# EAGLE board dancing-light-pcb-v1 (EAGLE 8.6.1)
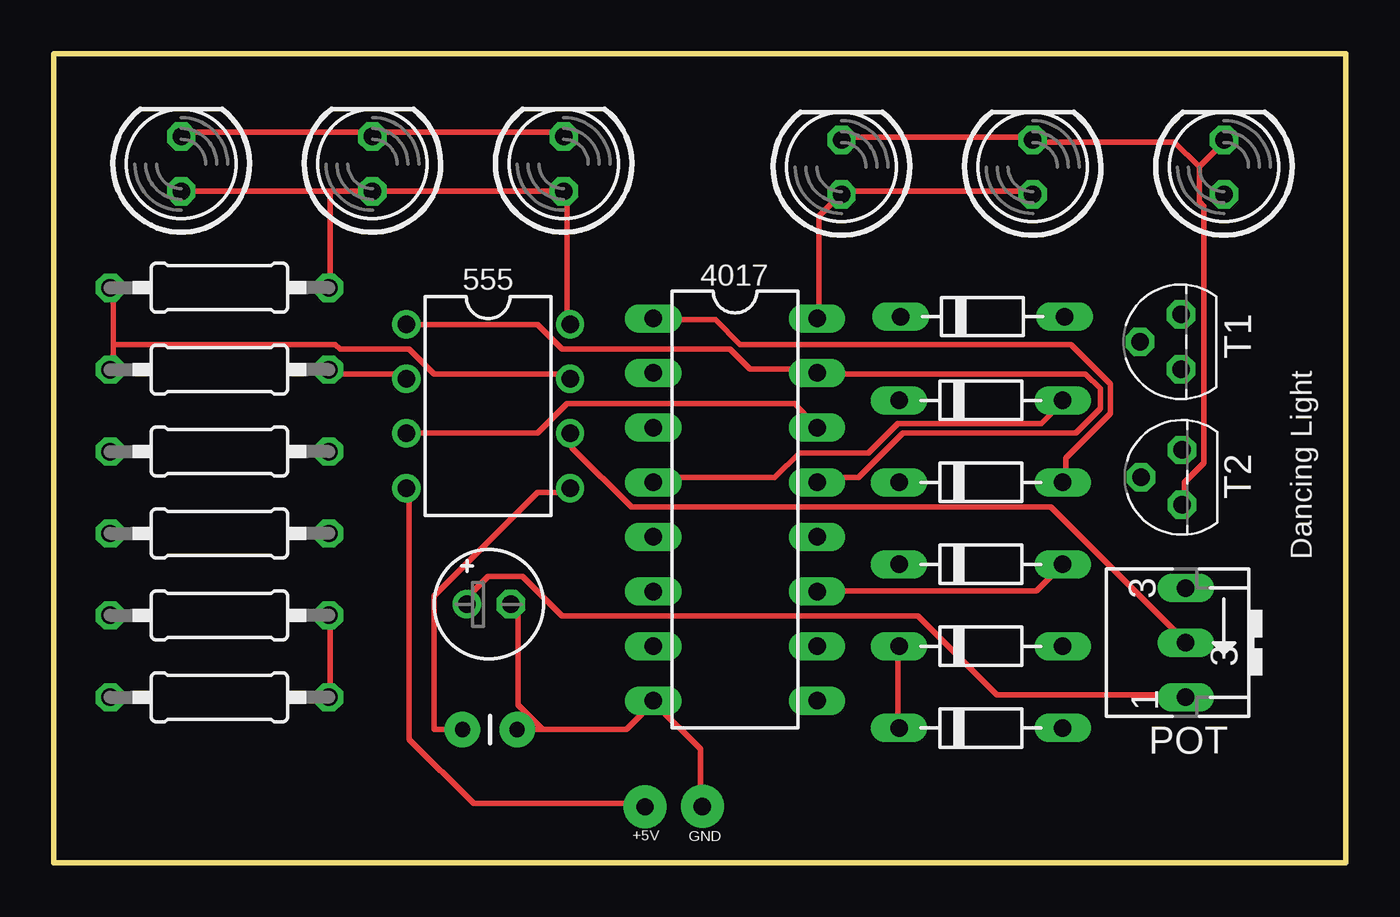
[diagram p0: board, top side]
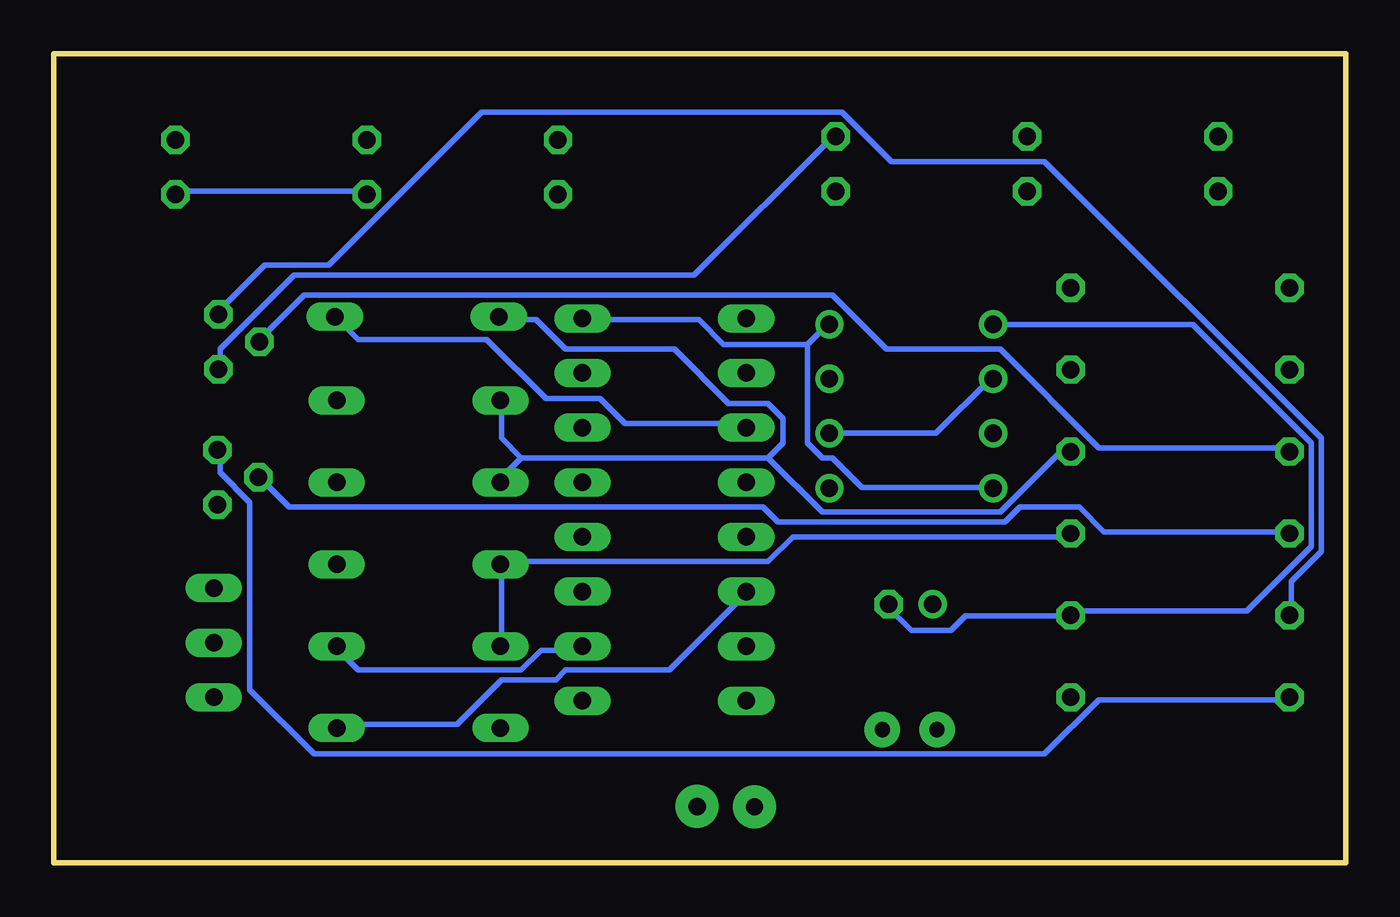
[diagram p1: board, bottom side, seen from below]

Size 60.06 x 37.62 mm. Coordinates in mm from the lower left corner, seen from the top.
Outline: 0,0 60.06,0 60.06,37.62 0,37.62 0,0
Copper layers (1*16): Top 0.035mm / dielectric 1.5mm / Bottom 0.035mm
Design rules "default *": minimum track width 10mil, minimum drill 24mil, track to track 8mil, track to pad 8mil, pad to pad 8mil, via to via 8mil, smd to smd 8mil, copper to edge 40mil, drill to drill 8mil, minimum pad ring 10mil, minimum via ring 8mil, stop-mask expansion 4mil, vias tented up to drill 0mil, thermal gap 8mil
Net classes: 0 default: clearance 0.205 mm

## Footprints (pad centres in the part's own frame; a part is rotated, then mirrored left to right if it is on the bottom)
DIL08 = drill 0.813 pad 1.27: 1 -3.81,-3.81; 2 -1.27,-3.81; 3 1.27,-3.81; 4 3.81,-3.81; 5 3.81,3.81; 6 1.27,3.81; 7 -1.27,3.81; 8 -3.81,3.81
DIL16 = drill 0.813 long: 1 -8.89,-3.81; 2 -6.35,-3.81; 3 -3.81,-3.81; 4 -1.27,-3.81; 5 1.27,-3.81; 6 3.81,-3.81; 7 6.35,-3.81; 8 8.89,-3.81; 9 8.89,3.81; 10 6.35,3.81; 11 3.81,3.81; 12 1.27,3.81; 13 -1.27,3.81; 14 -3.81,3.81; 15 -6.35,3.81; 16 -8.89,3.81
E2-5 = drill 0.813 pad 1.27: + -1.016,0 | drill 0.813 pad 1.27 octagon: - 1.016,0
CAP-PTH-2.54 = drill 0.7 pad 1.651: 1 -1.27,0; 2 1.27,0
D-7.5 = drill 0.813 long: A 3.81,0; C -3.81,0
LED5MM = drill 0.813 octagon: A -1.27,0; K 1.27,0
B25V = drill 0.813 long: A 2.54,0.635; E -2.54,0.635; S 0,0.635
0207/10 = drill 0.813 octagon: 1 -5.08,0; 2 5.08,0
TO92 = drill 0.813 octagon: 1 1.27,0; 2 0,1.905; 3 -1.27,0

## Placement (x,y rotation side)
555  [DIL08]  20.19,21.24 270 top
4017  [DIL16]  31.67,16.43 270 top
C1  4.7uF  [E2-5]  20.23,12.02 0 top
C2  10nF  [CAP-PTH-2.54]  20.27,6.2 0 top
D1  [D-7.5]  43.18,25.4 0 top
D2  [D-7.5]  43.1,21.51 0 top
D3  [D-7.5]  43.1,17.7 0 top
D4  [D-7.5]  43.1,13.89 0 top
D5  [D-7.5]  43.1,10.08 0 top
D6  [D-7.5]  43.1,6.27 0 top
D7  [LED5MM]  5.92,32.5 90 top
D8  [LED5MM]  14.81,32.5 90 top
D9  [LED5MM]  23.7,32.5 90 top
D10  [LED5MM]  36.62,32.36 90 top
D11  [LED5MM]  45.51,32.36 90 top
D12  [LED5MM]  54.4,32.36 90 top
POT  10k Ω  [B25V]  51.99,10.24 270 top
R1  1k‎Ω  [0207/10]  7.7,26.75 180 top
R2  20k‎Ω  [0207/10]  7.7,22.94 180 top
R3  220‎Ω  [0207/10]  7.7,19.13 180 top
R4  220‎Ω  [0207/10]  7.7,15.32 180 top
R5  100‎Ω  [0207/10]  7.7,11.51 180 top
R6  100‎Ω  [0207/10]  7.7,7.7 180 top
T1  [TO92]  52.4,24.23 90 top
T2  [TO92]  52.45,17.93 90 top

## Library data of the parts
555 = linear
4017 = 40xx
C1 R1-R3 R5 R6 = rcl
C2 = SparkFun-Capacitors
D1-D3 D5 D6 = diode
D4 R4 = AUTODESK_CIRCUITS_BREADBOARD
D7-D12 = led
POT = pot
T1 T2 = transistor

## Nets
GND: 555.1 4017.8 4017.13 4017.15 C1.- C2.2 R5.1 R6.1
N$1: 555.5 C2.1
N$2: 555.3 4017.14
N$3: 4017.4 D2.A
N$4: 4017.5
N$5: 4017.6 D6.A
N$6: 4017.7
N$7: 4017.11 D4.A
N$8: 4017.9
N$9: 4017.10 D5.A
N$11: 4017.1 D3.A
N$12: 4017.2
N$13: 4017.3 D1.A
N$14: 555.7 R1.2 R2.2
N$15: D1.C D2.C D3.C R3.1
N$16: D4.C D5.C D6.C R4.1
N$17: D7.K D8.K D9.K T1.3
N$18: R3.2 T1.2
N$19: R5.2 T1.1
N$20: D10.K D11.K D12.K T2.3
N$21: R6.2 T2.1
N$22: R4.2 T2.2
N$23: 4017.12
N$24: 555.2 555.6 POT.S R2.1
N$26: C1.+ POT.A
VCC: 555.4 555.8 4017.16 D7.A D8.A D9.A D10.A D11.A D12.A R1.1

## Tracks (layer width: path | path; a pad name or v marks a point on that pad's centre or on a via)
GND  (via drill 0.8 pad 2)
  Top 0.254: R6.1 12.85,7.82 12.85,11.49 R5.1 | v30.15,2.62 30.06,2.77 30.06,5.3 28,7.36 4017.8 27.77,7.36 26.62,6.21 22.95,6.21 C2.2 22.72,6.21 21.57,7.36 21.57,11.95 C1.- | 555.1 16.52,25.03 22.49,25.03 23.64,23.88 31.44,23.88 32.36,22.97 35.34,22.97 4017.15 35.57,22.74 47.97,22.74 48.65,22.05 48.65,21.13 47.51,19.98 39.47,19.98 37.41,17.92 35.57,17.92 4017.13
  Bottom 0.254: C1.- 21.34,11.95 20.2,10.8 18.36,10.8 17.67,11.49 12.85,11.49 R5.1 12.62,11.72 4.59,11.72 1.61,14.71 1.61,19.52 7.11,25.03 16.29,25.03 555.1
N$1
  Top 0.254: 555.5 23.87,17.23 22.49,17.23 17.67,12.41 17.67,6.21 C2.1
N$2
  Top 0.254: 555.3 16.52,19.98 22.49,19.98 23.87,21.36 34.42,21.36 35.34,20.44 4017.14
N$3
  Top 0.254: 4017.4 28,17.92 33.51,17.92 34.65,19.07 37.87,19.07 39.24,20.44 45.9,20.44 46.82,21.36 D2.A
N$5
  Bottom 0.254: D6.A 46.82,6.44 41.31,6.44 39.24,8.51 36.72,8.51 36.26,8.97 31.44,8.97 28,12.41 4017.6
N$7
  Top 0.254: 4017.11 35.57,12.64 45.67,12.64 46.82,13.79 D4.A
N$9
  Bottom 0.254: 4017.10 35.57,9.88 37.41,9.88 38.33,8.97 45.9,8.97 46.82,9.88 D5.A
N$11
  Top 0.254: D3.A 47.05,17.92 47.05,18.84 49.11,20.9 49.11,22.28 47.28,24.11 31.9,24.11 30.75,25.26 28,25.26 4017.1
N$13
  Bottom 0.254: 4017.3 28,20.44 33.51,20.44 34.65,21.59 37.18,21.59 39.93,24.34 45.9,24.34 46.82,25.26 D1.A
N$14
  Top 0.254: 2.75,24.11 2.75,26.64 R1.2 | 2.75,24.11 2.75,22.97 R2.2 | 2.75,24.11 13.08,24.11 13.31,23.88 16.52,23.88 17.67,22.74 23.87,22.74 555.7
N$15
  Bottom 0.254: 26.85,18.84 24.33,16.31 16.07,16.31 13.31,19.07 12.85,19.07 R3.1 | 38.33,18.84 26.85,18.84 | 38.33,18.84 39.24,17.92 D3.C | 38.33,18.84 39.24,19.75 39.24,21.36 D2.C | 26.85,18.84 26.16,19.52 26.16,20.67 26.85,21.36 28.69,21.36 31.21,23.88 36.26,23.88 37.64,25.26 39.24,25.26 D1.C
N$16
  Top 0.254: D6.C 39.24,6.44 39.24,9.88 D5.C
  Bottom 0.254: D5.C 39.24,10.12 39.24,13.79 D4.C 39.24,14.02 26.85,14.02 25.7,15.16 12.85,15.16 R4.1
N$17
  Top 0.254: D7.K 5.97,33.98 14.69,33.98 D8.K 14.92,33.98 23.64,33.98 D9.K
  Bottom 0.254: T1.3 52.33,22.97 52.33,23.88 48.88,27.33 30.29,27.33 23.87,33.75 D9.K
N$18
  Bottom 0.254: R3.2 2.75,19.29 11.47,19.29 16.07,23.88 21.34,23.88 23.87,26.41 48.42,26.41 50.49,24.34 T1.2
N$19
  Bottom 0.254: R5.2 2.52,11.72 2.52,13.1 1.15,14.48 1.15,19.75 14,32.61 21.11,32.61 23.41,34.9 40.16,34.9 47.28,27.79 50.26,27.79 52.33,25.72 T1.1
N$20
  Top 0.254: D10.K 36.72,33.75 45.44,33.75 D11.K 45.67,33.52 52.1,33.52 53.24,32.38 | 53.24,32.38 53.24,30.77 53.47,30.54 53.47,18.61 52.56,17.69 52.56,16.77 T2.3 | 53.24,32.38 54.39,33.52 D12.K
N$21
  Bottom 0.254: R6.2 2.75,7.59 11.47,7.59 14,5.07 47.97,5.07 50.95,8.05 50.95,16.77 52.33,18.15 52.33,19.07 T2.1
N$22
  Bottom 0.254: R4.2 2.75,15.39 11.24,15.39 12.39,16.54 15.15,16.54 15.84,15.85 26.39,15.85 27.08,16.54 49.11,16.54 50.49,17.92 T2.2
N$24
  Top 0.254: R2.1 12.85,22.74 16.29,22.74 555.2 | POT.S 52.56,10.34 46.36,16.54 26.85,16.54 24.1,19.29 24.1,19.75 555.6
  Bottom 0.254: 555.6 23.87,19.98 19.05,19.98 16.52,22.51 555.2
N$26
  Top 0.254: POT.A 52.56,7.82 43.83,7.82 40.16,11.49 23.64,11.49 21.8,13.33 20.2,13.33 19.05,12.18 C1.+
VCC  (via drill 0.8 pad 2)
  Top 0.254: 4017.16 35.57,25.49 35.57,30.08 36.49,31 D10.A 36.72,31.23 45.44,31.23 D11.A | v27.49,2.61 27.31,2.77 19.51,2.77 16.52,5.75 16.52,17.23 555.4 | 555.8 23.87,25.26 23.87,31.23 D9.A 23.64,31.23 14.92,31.23 D8.A 14.69,31.23 12.85,31.23 | 12.85,31.23 5.97,31.23 D7.A | 12.85,31.23 12.85,26.87 R1.1
  Bottom 0.254: D11.A 45.67,31.23 54.39,31.23 D12.A | 25.02,24.11 25.02,19.52 24.33,18.84 23.87,18.84 22.49,17.46 16.52,17.46 555.4 | 25.02,24.11 24.1,25.03 555.8 | 25.02,24.11 28.92,24.11 30.06,25.26 35.34,25.26 4017.16

## Text on the board
tNames: Dancing Light | +5V | GND